# Altium PCB RADARPCB.PcbDoc
Units mil, origin at the board's own origin, x right, y up, seen from the top; angles counter-clockwise.
Board outline 3695 x 1210 mil, 2 copper layers (Top Layer, Bottom Layer); 42 components, 32 nets, 169 pads, 46 vias.
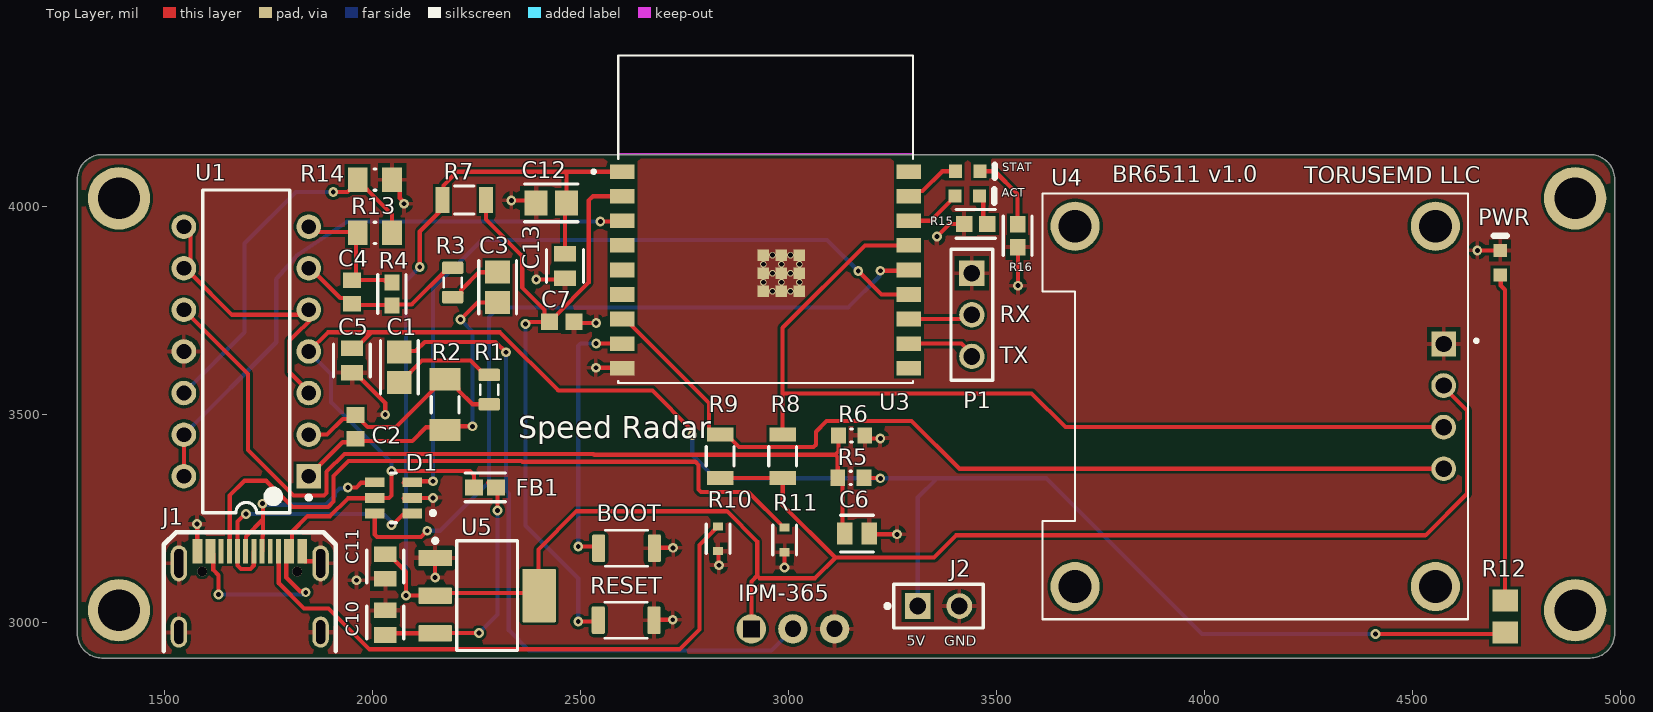
[diagram p0: Top Layer view]
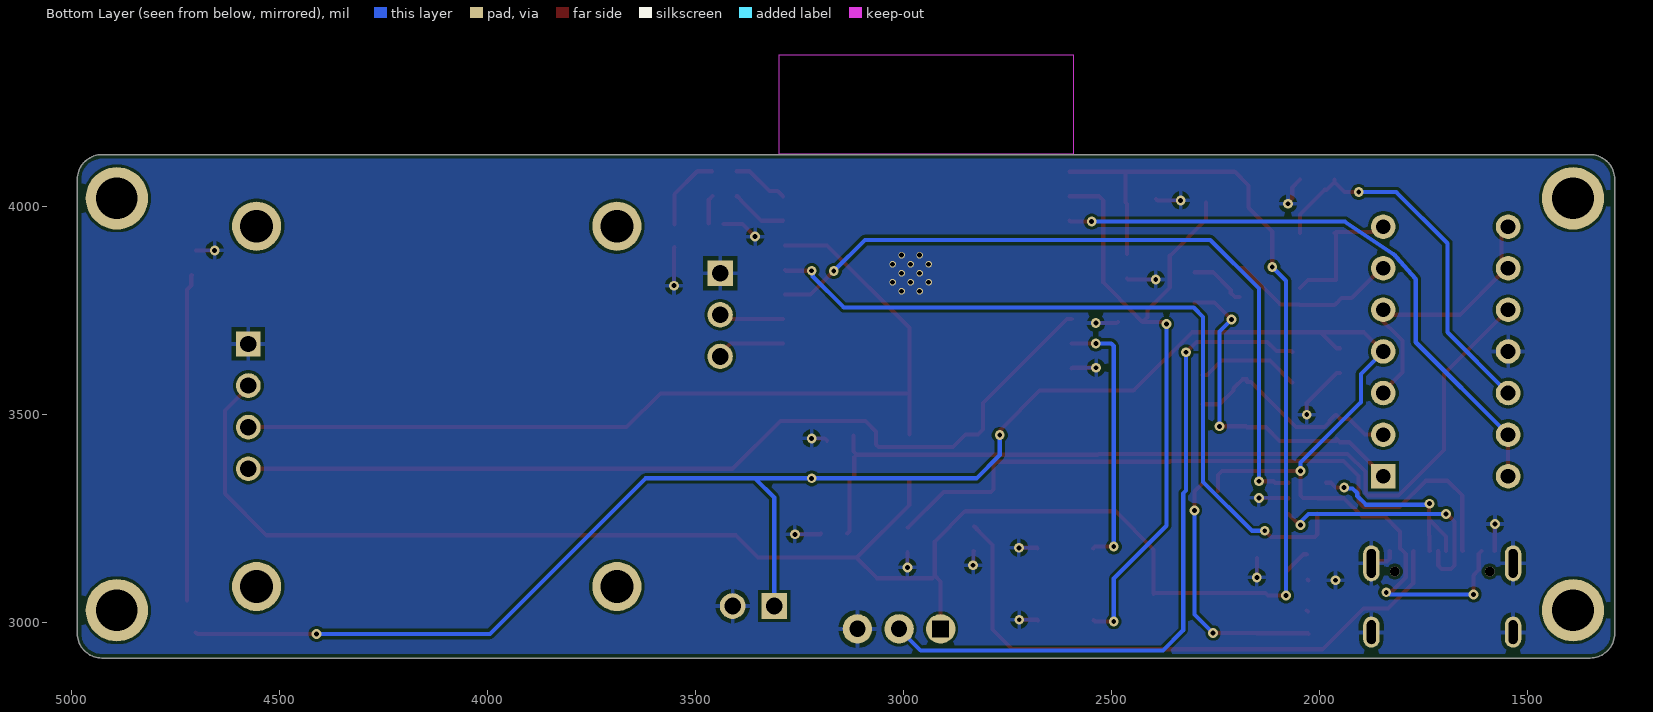
[diagram p1: Bottom Layer view, seen from below]
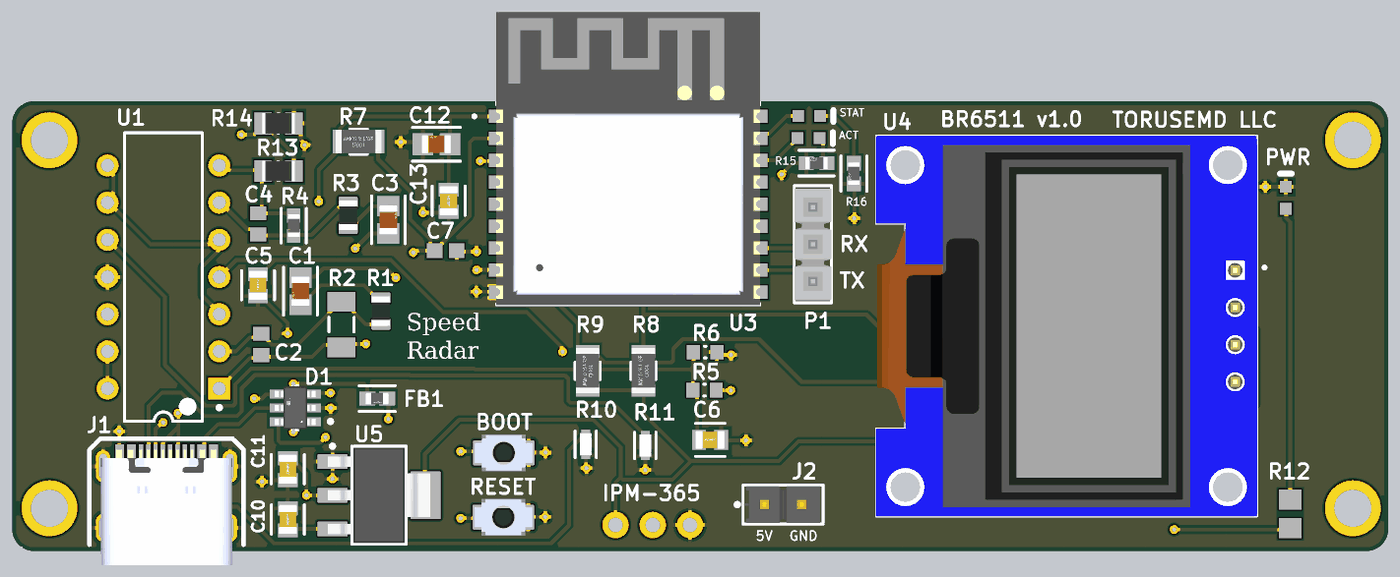
[diagram p2: 3D render of the assembled board from above, using the file's embedded part models]

## Layer stack, top to bottom
Top Solder: solder mask 0.4, Solder Resist, Dk 3.5
Top Layer: signal copper 1.4
Dielectric 1: dielectric 12.6, FR-4, Dk 4.8
Bottom Layer: signal copper 1.4
Bottom Solder: solder mask 0.4, Solder Resist, Dk 3.5

## Board outline
1290,2974.06 1290,4065.94 cw(c1349.06,4065.94) 1349.06,4125 4925.94,4125 cw(c4925.94,4065.94) 4985,4065.94 4985,2974.06 cw(c4925.94,2974.06) 4925.94,2915 1349.06,2915 cw(c1349.06,2974.06)

## Design rules (kind name [scope] priority, off if disabled: settings)
BoardOutlineClearance [All] p1: gap=10 ignorepadtopadclearanceinfootprint=FALSE except(0: Arc-SplitContinuation Track-SplitContinuation SMDPad-SplitContinuation THPad-SplitContinuation Via-SplitContinuation Fill-SplitContinuation Poly-SplitContinuation Region-SplitContinuation Text-SplitContinuation)
Clearance [All] p1: gap=7 ignorepadtopadclearanceinfootprint=FALSE except(5: SMDPad-SMDPad)
DiffPairsRouting [All] p1: maxlimit=10 minlimit=10 mostfreqgap=10 toplayer_minwidth=15 toplayer_maxwidth=15 toplayer_prefwidth=15 bottomlayer_minwidth=15 bottomlayer_maxwidth=15 bottomlayer_prefwidth=15 maxuncoupledlength=500
MinimumAnnularRing MinimumAnnularRing_1 [All] p1: minimumring=1
MinimumSolderMaskSliver MinimumSolderMaskSliver_1 [HasFootprint('RESC1005X40X25ML05T05') vs HasFootprint('RESC1005X40X25ML05T05')] p1: minsoldermaskwidth=5
PolygonConnect ESP32GND [InNet('GND') vs HasFootprint('MODULE_ESP32-C3-WROOM-02-H4')] p1: connectstyle=Direct reliefconductorwidth=10 reliefentries=4 polygonreliefangle="90 Angle" airgapwidth=10
PolygonConnect [All] p2: connectstyle=Relief reliefconductorwidth=10 reliefentries=4 polygonreliefangle="90 Angle" airgapwidth=10
RoutingVias [All] p1: holewidth=28 width=50 viastyle="Through Hole" minholewidth=28 minwidth=50 maxholewidth=28 maxwidth=50
SilkToSilkClearance [All] p1: silktosilkclearance=5.91
SilkToSolderMaskClearance [IsPad] p1: minsilkscreentomaskgap=3.94 clearancetoexposedcopper=TRUE
SolderMaskExpansion [All] p1: expansion=4 istentingtop=FALSE soldermaskfromhole=TRUE
SupplyNets "Schematic Supply Nets" [InNet('GND')] p1: voltage=0.000
SupplyNets "Schematic Supply Nets_4" [InNet('3V3')] p2: voltage=0.000
SupplyNets "Schematic Supply Nets_1" [InNet('5V')] p3: voltage=0.000
Width [All] p1: maxlimit=10 minlimit=10 preferedwidth=10
26 further rules are at their usual default settings.

## Classes and differential pairs
component class U_Power_Supply: C10 C11 D1 FB1 J1 J2 PWR R10 R11 R12 U5
component class U_Radar_Analog: C1 C2 C3 C4 C5 C6 IPM-365 R1 R2 R3 R4 R5 R6 R13 R14 U1
component class U_Radar_Digital: ACT BOOT C7 C12 C13 P1 r R7 R8 R9 R15 R16 RESET STAT U3 U4
differential pair D: +D_P -D_N

## Components (designator, comment, footprint, x,y, rotation, side; value= is the part's Value field where it differs from the comment)
ACT "HSMS-C190" AVAG-HSMX-C190_V 3428.6,4025.71 r0 top
BOOT "B3U-1000P-B" OMRON-B3U-1000P-2-B_V 2609.99,3178.91 r180 top
C1 "GCD21BR71H104KA01L" FP-GCD21B-0_15-IPC_A 2064,3614 r270 top value=0.1uF
C2 "2.7nF (VJ0603Y183KXAAC)" CAPC1608X92X38ML15T08 1958.66,3470.63 r270 top
C3 "GCD21BR71H104KA01L" FP-GCD21B-0_15-IPC_A 2300,3806 r90 top value=0.1uF
C4 "18nF" CAPC1608X92X38ML15T08 1950,3795 r90 top
C5 "10uF" FP-C0805C106K8RACAUTO-MFG 1950,3630 r270 top
C6 "10uF" FP-C0805C106K8RACAUTO-MFG 3164,3214 r0 top
C7 "1uF" CAPC1608X90X35NL15T15 2454,3723 r180 top
C10 "10uF" FP-C0805C106K8RACAUTO-MFG 2030,3000 r90 top
C11 "10uF" FP-C0805C106K8RACAUTO-MFG 2030,3135 r270 top
C12 "GCD21BR71H104KA01L" FP-GCD21B-0_15-IPC_A 2429,4009 r180 top value=0.1uF
C13 "10uF" FP-C0805C106K8RACAUTO-MFG 2462,3857 r270 top
D1 "USBLC6-4SC6" FP-SOT23-6L-MFG 2050,3300 r180 top value=3pF
FB1 "600 Ohm @ 100 MHz" FP-BLM18-0_15-t0_8-IPC_B 2270,3325 r0 top
IPM-365 "Component_1" PCBComponent_1 2910,2985 r0 top
J1 "TYPE-C-31-M-12" TYPE-C-31-M-12 1704.37,3060 r0 top
J2 "TSW-102-07-L-S" FP-TSW-102-07-L-S-MFG 3360,3040 r0 top
P1 "TSW-103-07-T-S" SMTC-TSW-103-07-X-S 3440,3840 r270 top
PWR "HSMG-C190" AVAG-HSMX-C190_V 4710,3865 r90 top
R1 "Resistor 1K +/-5% 0805 125 mW" RESC0805(2012)_L 2280,3560 r270 top value=1k
R2 "8.2k 1% 1206(3216)" RESC1206(3216)_M 2174,3524 r270 top value="8200.00 Ohm"
R3 "Resistor 1K +/-5% 0805 125 mW" RESC0805(2012)_L 2192,3817.89 r90 top value=1k
R4 "1.3k" FP-TFCR0603-IPC_B 2046,3790 r90 top
R5 "100K 5% 0603(1608)" RESC0603(1608)_N 3149,3348 r0 top value="100000.00 Ohm"
R6 "100K 5% 0603(1608)" RESC0603(1608)_N 3151,3450 r180 top value="100000.00 Ohm"
R7 "10kΩ" FP-RQ732B-IPC_C 2220,4016 r180 top value=10KΩ
R8 "10kΩ" FP-RQ732B-IPC_C 2985,3400 r270 top value=10KΩ
R9 "10kΩ" FP-RQ732B-IPC_C 2835,3400 r270 top value=10KΩ
R10 "5.1k" KOA_Speer_RN73R1J_MFG 2830,3202 r270 top
R11 "5.1k" KOA_Speer_RN73R1J_MFG 2990,3199 r270 top
R12 "200" RESC2013X70X40ML20T20 4721.76,3015 r90 top
R13 "Resistor 10k +/-1% 0805 125 mW" RESC2013X50X35ML15T15 2005,3937 r180 top value=10k
R14 "Resistor 10k +/-1% 0805 125 mW" RESC2013X50X35ML15T15 2005,4065 r180 top value=10k
R15 "330R (RMCF0603JG330R)" FP-RMCF0603-IPC_B 3449.66,3958.37 r180 top
R16 "330R (RMCF0603JG330R)" FP-RMCF0603-IPC_B 3550,3930 r270 top
RESET "B3U-1000P-B" OMRON-B3U-1000P-2-B_V 2608.93,3006 r0 top
STAT "HSMY-C190" AVAG-HSMX-C190_V 3430,4085 r0 top
U1 "LM324AN" TI-N0014A 1696,3652 r180 top
U3 "ESP32-C3-WROOM-02-H4" MODULE_ESP32-C3-WROOM-02-H4 2944.32,3969.92 r0 top
U4 "DM-OLED096-636" MODULE_DM-OLED096-636 4121.2,3520 r270 top
U5 "LMS8117AMP-3.3/NOPB" DCY0004A_M 2275,3065 r0 top

## Footprints (in the part's own frame and the unit in brackets; to place one, negate y for a bottom-side part, rotate by r counter-clockwise, add the part's x,y. Pads: shape width x height; smd on the part's side, far side on the other; paste and mask are expansions set on the pad)
AVAG-HSMX-C190_V [mm] "SMD, 2-Leads, Body 1.6x0.8mm, Height 0.9mm"
  rect 0.8x0.8 smd: 1(-0.75,0) 2(0.75,0)
  silkscreen extent 1.65,-0.4 1.65,0.4, body extent -0.8,-0.4 0.8,0.4, height 0.9
CAPC1608X90X35NL15T15 [mm] "Chip Capacitor, 2-Leads, Body 1.60x0.81mm, IPC Medium Density"
  rect 1.05x1 smd: 1(-0.75,0) 2(0.75,0)
  body extent -0.88,-0.48 0.87,0.48, height 0.9
CAPC1608X92X38ML15T08 [mm] "Chip Capacitor, 2-Leads, Body 1.60x0.80mm, IPC Low Density"
  rect 0.95x1.1 smd: 1(-0.725,0) 2(0.725,0)
  body extent -0.87,-0.48 0.87,0.47, height 0.92
DCY0004A_M [mm] "SOT223, 4-Leads, Body 6.7x3.7mm, Pitch 2.3mm, IPC Low Density"
  rrect10% 2.05x1 smd: 1(-3.175,2.3) 2(-3.175,0) 3(-3.175,-2.3)
  rrect5% 2.05x3.25 smd: 4(3.175,0)
  silkscreen extent -3.3,-3.35 1.85,3.47, body extent -3.5,-3.25 3.5,3.25, height 1.62
FP-BLM18-0_15-t0_8-IPC_B [mil]
  rect 43.55x37.73 smd paste+0 mask+0: 1(-26.62,0) 2(26.62,0)
  silkscreen extent -48,-35 48,35, body extent -58,-29 58,29, height 10
FP-C0805C106K8RACAUTO-MFG [mm]
  rect 0.95x1.35 smd paste+0 mask+0: 1(-0.75,0) 2(0.75,0)
  silkscreen extent -1,-1.12 1,1.12, body extent -1.4,-0.85 1.4,0.85, height 0.25
FP-GCD21B-0_15-IPC_A [mil]
  rect 55.34x59.38 smd paste+0 mask+0: 1(-36.47,0) 2(36.47,0)
  silkscreen extent -64,-45 64,45, body extent -84,-49 84,49, height 10
FP-RMCF0603-IPC_B [mil]
  rect 39.61x37.73 smd paste+0 mask+0: 1(-27.6,0) 2(27.6,0)
  silkscreen extent -47,-35 47,35, body extent -57,-29 57,29, height 10
FP-RQ732B-IPC_C [mil]
  rect 33.79x63.47 smd paste+0 mask+0: 1(-52.24,0) 2(52.24,0)
  silkscreen extent -24,-33 24,33, body extent -73,-37 73,37, height 10
FP-SOT23-6L-MFG [mm]
  rect 1.2x0.6 smd paste+0 mask+0: 1(-1.15,0.95) 2(-1.15,0) 3(-1.15,-0.95) 4(1.15,-0.95) 5(1.15,0) 6(1.15,0.95)
  silkscreen extent -2.53,-1.53 0.18,1.53, body extent -1.85,-1.63 1.85,1.63, height 0.25
FP-TFCR0603-IPC_B [mil]
  rect 37.72x35.91 smd paste+0 mask+0: 1(-27.64,0) 2(27.64,0)
  silkscreen extent -46,-34 46,34, body extent -56,-28 56,28, height 10
FP-TSW-102-07-L-S-MFG [mm]
  rect 1.57x1.57 hole 1.02 paste-2539.97 mask+0: 1(-1.27,0)
  round 1.57 hole 1.02 paste-2539.97 mask+0: 2(1.27,0)
  silkscreen extent -3.25,-1.34 2.73,1.34, body extent -2.83,-1.44 2.83,1.44, height 0.25
KOA_Speer_RN73R1J_MFG [mm]
  rect 0.5x0.6 smd paste+0 mask+0: 1(-0.75,0) 2(0.75,0)
  silkscreen extent -0.9,-0.72 0.9,0.72, body extent -1.1,-0.55 1.1,0.55, height 0.25
MODULE_DM-OLED096-636 [mm]
  rect 1.508x1.508 / inner round 1.508 / far side rect 1.508x1.508 hole 1: 1(-3.81,11.5)
  round 1.508 hole 1: 2(-1.27,11.5) 3(1.27,11.5) 4(3.81,11.5)
  round 3 hole 2: S1(-11,11) S2(11,11) S3(11,-11) S4(-11,-11)
  silkscreen extent -13,-13 13,13.6, body extent -13,-13 13,13, height 5.66
MODULE_ESP32-C3-WROOM-02-H4 [mm]
  rect 1.5x0.9 smd: 1(-8.75,2.9) 2(-8.75,1.4) 3(-8.75,-0.1) 4(-8.75,-1.6) 5(-8.75,-3.1) 6(-8.75,-4.6) 7(-8.75,-6.1) 8(-8.75,-7.6) 9(-8.75,-9.1) 10(8.75,-9.1) 11(8.75,-7.6) 12(8.75,-6.1) 13(8.75,-4.6) 14(8.75,-3.1) 15(8.75,-1.6) 16(8.75,-0.1) 17(8.75,1.4) 18(8.75,2.9)
  rect 0.7x0.7 smd: 19(-0.14,-2.2) 20(0.96,-2.2) 21(2.06,-2.2) 22(-0.14,-3.3) 23(0.96,-3.3) 24(2.06,-3.3) 25(-0.14,-4.4) 26(0.96,-4.4) 27(2.06,-4.4)
  round 0.4 hole 0.3 mask+0: 28(0.41,-2.2) 29(1.51,-2.2) 30(-0.14,-2.75) 31(0.96,-2.75) 32(2.06,-2.75) 33(0.41,-3.3) 34(1.51,-3.3) 35(-0.14,-3.85) 36(0.96,-3.85) 37(2.06,-3.85) 38(0.41,-4.4) 39(1.51,-4.4)
  Keep-Out Layer region: 9,4 -9,4 -9,10 9,10
  Keep-Out Layer region: 9,4 -9,4 -9,10 9,10
  silkscreen extent -10.6,-10 9,10, body extent -9,-10 9,10, height 3.35
OMRON-B3U-1000P-2-B_V [mm] "SMT, 2-Leads, Body 3x2.5mm"
  rrect25% 0.8x1.7 smd: 1(-1.7,0) 2(1.7,0)
  round 0 on Mech1: H1(0,0)
  silkscreen extent -1.3,-1.1 1.3,1.1, body extent -2,-1.25 2,1.25, height 1.6
PCBComponent_1 [mm]
  round 1.8 hole 1 square: 1(0,0)
  round 1.8 hole 1: 2(2.54,0) 3(5.08,0)
RESC0603(1608)_N [mm] "Chip Resistor, Body 1.6x0.8mm, IPC Medium Density"
  rect 0.9x1 smd: 1(-0.8,0) 2(0.8,0)
  silkscreen extent -0.05,-0.4 0.05,0.4, body extent -0.85,-0.47 0.85,0.47, height 0.6
RESC0805(2012)_L [mm] "Chip Resistor, Body 2.0x1.3mm, IPC High Density"
  rrect25% 0.76x1.3 smd: 1(-0.9,0) 2(0.89,0)
  silkscreen extent -0.3,-0.55 0.3,0.55, body extent -1,-0.62 1,0.63, height 0.6
RESC1206(3216)_M [mm] "Chip Resistor, Body 3.2x1.6mm, IPC Low Density"
  rect 1.35x1.9 smd: 1(-1.55,0) 2(1.55,0)
  silkscreen extent -0.5,-0.85 0.5,0.85, body extent -1.67,-0.87 1.67,0.87, height 0.75
RESC2013X50X35ML15T15 [mm] "Chip Resistor, 2-Leads, Body 2.2x1.4mm, IPC Low Density"
  rect 1.2x1.5 smd: 1(-1.05,0) 2(1.05,0)
  silkscreen extent -0.05,-0.65 0.05,0.65, body extent -1.1,-0.7 1.1,0.7, height 0.5
RESC2013X70X40ML20T20 [mm] "Chip Resistor, 2-Leads, Body 2.00x1.25mm, IPC Low Density"
  rect 1.35x1.55 smd: 1(-0.975,0) 2(0.975,0)
  body extent -1.1,-0.72 1.1,0.72, height 0.7
SMTC-TSW-103-07-X-S [mm] ".025 SQ Post Terminal Strip Assembly, 1x3 Pins, Vertical, 2.54mm Pitch, Male"
  rect 1.55x1.55 hole 1.02: 1(0,0)
  round 1.55 hole 1.02: 2(2.54,0) 3(5.08,0)
  silkscreen extent -1.46,-1.27 6.54,1.27, body extent -1.27,-1.27 6.35,1.27, height 8.38
TI-N0014A [mm] "DIP, 14-Leads, Body 19.7x6.6mm, Pitch 2.54mm"
  rect 1.5x1.5 hole 0.9: 1(-3.81,7.62)
  round 1.5 hole 0.9: 2(-3.81,5.08) 3(-3.81,2.54) 4(-3.81,0) 5(-3.81,-2.54) 6(-3.81,-5.08) 7(-3.81,-7.62) 8(3.81,-7.62) 9(3.81,-5.08) 10(3.81,-2.54) 11(3.81,0) 12(3.81,2.54) 13(3.81,5.08) 14(3.81,7.62)
  silkscreen extent -3.94,-9.85 2.65,9.85, body extent -3.95,-9.85 3.95,9.85, height 5.08
TYPE-C-31-M-12 [mm]
  rect 0.6x1.5 smd mask+0.07: A1B12(-3.2,2.85) B1A12(3.2,2.85)
  rect 0.6x1.5 smd mask+0.14: A4B9(-2.4,2.85) B4A9(2.4,2.85)
  rect 0.3x1.5 smd mask+0.14: A5(-1.25,2.85) A6(-0.25,2.85) A7(0.25,2.85) A8(1.25,2.85) B5(1.75,2.85) B6(0.75,2.85) B7(-0.75,2.85) B8(-1.75,2.85)
  round 0.6 hole 0.6 unplated mask+0.3: MH(-2.9,1.6) MH(2.9,1.6)
  oval 1x1.9 hole 0.55 slot 1.45 at 90 deg mask+0.05: SH(-4.325,-2.1) SH(4.325,-2.1)
  oval 1x2.2 hole 0.55 slot 1.75 at 90 deg mask+0.05: SH(-4.325,2.1) SH(4.325,2.1)
  silkscreen extent -5.25,-3.25 5.25,4, body extent -4.47,-4.65 4.47,3.25, height 3.32

## Part data
ACT: library part CMP-2000-06427-1, "LED Uni-Color Red, 52 mW, 20 mA, -40 to 85 degC, 2-Pin SMD, RoHS, Tape and Reel", Emitting Color=Red, Forward Current=25mA, Forward Voltage=2.6V, Manufacturer=Avago, Operating Temp Range=-40Cto85C, Operating Temperature Classification=Industrial, Package Description="2-Pin Surface Mount Device, Body 1.6 x 0.8 mm, Height 0.9 mm", Package Reference=HSMX-C190, Package Type=ChipLed, Power Dissipation=52W, Reverse Voltage=5V, Test Current (It)=20mA, Chip Material=GaP, Datasheet URL=http://docs.avagotech.com/docs/AV02-0551EN, Datasheet Version=03/2012, DELETED=Compliant, Dominant Wave Length=626nm, High Brightness=No, Lens Dimensions=1x0.8x0.5mm, Lens Type=ColorlessDiffused, Lum Intensity=10mcd, Luminous Intensity=10mcd, Main Category=ChipLED, Manufacturer URL=http://www.avagotech.com/, Mounting=SurfaceMount, Mounting Technology=SurfaceMount, Number of  Elements=1, Packaging=TapeandReel, Peak Wavelength=630nm, Pin Count=2, Product Depth (mm)=0.8mm, Product Height (mm)=0.8mm, Product Length (mm)=1.6mm, Rad Hardened=No, Shape Type=Rectangular, Type=Uni-Color, Viewing Angle=170deg
BOOT RESET: library part CMP-011-00011-3, "Ultra-small Surface-mounting Tactile Switches with High Contact Reliability, SPST-NO, -25 to 70 degC, 2-Pin SMD, RoHS, Tape and Reel", Current Rating=50mA, Voltage Rating=12V, Pins=2, RoHS Compliant=Details
C1 C3 C12: library part CMP-001-00087-1, "Ceramic Capacitor, Multilayer, Ceramic, 50V, 10% +Tol, 10% -Tol, X7R, 15% TC, 0.1uF, Surface Mount, 0805", Capacitor Type=Ceramic, Case/Package=0805, Max Operating Temperature=125°C, Min Operating Temperature=-55°C, Mounting Technology="Surface Mount", Pins=2, RoHS Compliant=Yes
  C3: ComponentLink1Description="New link", ComponentLink2Description="New link 1"
C2: library part CMP-2006-01326-1, Manufacturer=Vitramon, Part Number=VJ0603Y183KXAAC
C4: library part CMP-1035-02398-2, Manufacturer=Vitramon, Part Number=VJ0603Y183JXXAC
C5 C6 C10 C11 C13: library part CMP-03020-034662-1, "CAP CER 10UF 10V X7R 0805", Case Code (Imperial)=0805, Case Code (Metric)=2012, Max Operating Temperature=125°C, Min Operating Temperature=-55°C, Ratings=AEC-Q200, Tolerance=10%, Voltage Rating=10V, Capacitance=10uF, Case/Package=0805, Mount="Surface Mount", Packaging="Tape and Reel", RoHS Compliant=Yes
C7: library part CMP-2006-04534-1, Manufacturer="AVX Interconnect / Elco", Part Number=0603YD105MAT2A
D1: library part CMP-2000-07370-2, "TVS DIODE 5.25V 17V SOT23-6", Breakdown Voltage=6V, Capacitance=3pF, Clamping Voltage=17V, Manufacturer=STMicroelectronics, Max Junction Temp=+125°C, Package=SOT23-6L, Peak Pulse Power=130W, Temperature="-40°C to +125°C", Temperature Range Low=-40°C, Automotive=No, Category=Diode, ComponentLink2Description=Datasheet, ComponentLink2URL=https://upverter.com/datasheet/23dc4ffb028d868909e80577610284b194f13213.pdf, Device Class L1="Circuit Protection", Device Class L2="ESD and Circuit Protection ICs", Device Class L3=unset, Digikey Description="TVS DIODE 5.25V 17V SOT23-6", Direction=Unidirectional, Height=1.45mm, Interface=USB,Ethernet,Other, Lead Free=Yes, Manufacturer Part Number=USBLC6-4SC6, Mouser Description="USBLC6 Series 4 Line 6 V Uni / Bi-Directional ESD Protection - SOT-23-6", Number Of Channels=4, Octopart=https://octopart.com/usblc6-4sc6-stmicroelectronics-347147, RoHS=TRUE, Standoff Height=0mm, Temperature Range High=+125°C
FB1: library part CMP-06046-001498-1, "Chip Ferrite Bead, 0603, 600Ω @ 100MHz, 0.25Ω, 25%, 800mA"
J1: library part CMP-002-00145-2, "USB Type C Connector Horizontal SMT", Manufacturer="Koren Hroparts", Design Item ID=TYPE-C-31-M-12, Manufacturer Part Number=TYPE-C-31-M-12, Source=Schematic-Lib-PhilsLab.SchLib, System=Connector
J2: library part CMP-02766-001428-1, "CONN HEADER VERT 2POS 2.54MM", Color=Black, Current Rating=7.6A, Max Operating Temperature=125°C, Max Voltage Rating (AC)=550V, Min Operating Temperature=-55°C, Package Quantity=1, Connector Type="Male Pin", Contact Material=Bronze, Contact Mating Length=0.23inch, Contact Plating=Gold, Contact Type="Male Pin", Depth=2.54mm, Gender=Male, Housing Color=Black, Housing Material=Polyester, Lead Free="Lead Free", Length=5.08mm, Max Current Rating=7.6A, Mount="Through Hole", Number of Contacts=2, Number of Positions=2, Number of Rows=1, Orientation=Straight, Packaging=Bulk, Pitch=2.54mm, Radiation Hardening=No, REACH SVHC="No SVHC", RoHS Compliant=Yes, Series=TSW, Termination=Solder, Voltage Rating=550V, Width=2.54mm
P1: library part CMP-1024-00332-1, "0.025\" SQ Post Header, Through-hole, Vertical, -55 to 105 degC, 2.54 mm Pitch, 3-Pin, Male, RoHS", Manufacturer=Samtec, Temperature Range="-55 to 105 degC", ComponentLink1Description="Manufacturer URL", ComponentLink1URL=http://www.samtec.com, ComponentLink2Description=Datasheet, ComponentLink2URL=http://www.samtec.com/documents/webfiles/pdf/TSW_TH.PDF, ComponentLink3Description="Package Specification", ComponentLink3URL=http://www.samtec.com/documents/webfiles/cpdf/TSW-XXX-XX-XXX-X-XX-XXX-MKT.pdf, DatasheetVersion=F-214, Mounting Technology=Through-hole, Orientation=Vertical, PackageDescription=".025[0.64] SQ. Post Terminal Strip Assembly", PackageReference=TSW-103-07-X-S, PackageVersion="DM, 8/1988", PartNumber=TSW-103-07-T-S, Pitch="2.54 mm", RoHS=True
PWR: library part CMP-007-00013-2, "LED Uni-Color Green, 52 mW, 20 mA, -40 to 85 degC, 2-Pin SMD, RoHS, Tape and Reel", Case/Package=0603, Colour=Green, Forward Current=20mA, Forward Voltage=2.2V, Manufacturer=Avago, Max Operating Temperature=85°C, Min Operating Temperature=-40°C, Package Description="2-Pin Surface Mount Device, Body 1.6 x 0.8 mm, Height 0.9 mm", Package Quantity=4000, Package Reference=HSMX-C190, Power=52mW, Datasheet URL=http://docs.avagotech.com/docs/AV02-0551EN, Datasheet Version=Mar-12, Illumination Colour=Green, Lens Style=Diffused, Luminous Intensity=15mcd, Manufacturer URL=http://www.avagotech.com/, Mounting Technology=SM, Nominal Vf=2.2V, Packaging=TapeandReel, Pins=2, RoHS Compliant=True, Viewing Angle=170degrees
R1 R3: library part CMP-009-00118-4, "Chip Resistor, 1 kOhms, +/-5%, 125 mW, -55 to 155 degC, 0805", Case/Package=0805, Max Operating Temperature=155°C, Min Operating Temperature=-55°C, Power=125mW, Tolerance=5%, Pins=2
R2: library part CMP-1014-00613-1, "8K2 0.25W 1% 1206 (3216 Metric)  SMD", Case-EIA=1206, Case-Metric=3216, Power="0.25 W", Tolerance="1 %", Technology=SMT
R4: library part CMP-250906-279364-1, "RES Thin Film,  1.3kΩ, 0.1%, 0.1W, 25ppm/°C, 0603"
R5 R6: library part CMP-1012-00122-1, "100K 0.1W 5% 0603 (1608 Metric)  SMD", Case-EIA=0603, Case-Metric=1608, Power="0.1 W", Tolerance="5 %", Technology=SMT
R7 R8 R9: library part CMP-03211-005393-1, "RQ732B 1206 10KΩ 0.4W 10ppm/°C 0.1% 200V", Manufacturer=TE, Manufacturer Part Number=RQ73C2B10KBTD, Package=RQ732B, Power Rating=0.4W, Resistance=10KΩ, Temperature="-55°C to +155°C", Temperature Coefficient=10ppm/°C, Temperature Range High=+155°C, Temperature Range Low=-55°C, Tolerance=0.1%, Voltage Rating=200V, Automotive=Yes, Automotive Grade="Grade 0", Category=Res, ComponentLink2Description=Datasheet, ComponentLink2URL=https://www.te.com/commerce/DocumentDelivery/DDEController?Action=showdoc&DocId=Data+Sheet%7F1773270-2%7FA%7Fpdf%7FEnglish%7FENG_DS_1773270-2_A.pdf%7F9-2176388-464, Composition="Thin Film", Device Class L1="Passive Components", Device Class L2=Resistors, Device Class L3="Chip SMD Resistors", Height=0.75mm, Ipc Land Pattern Name=RESC310160X60, Lead Free=Yes, Octopart=https://octopart.com/rq73c2b10kbtd-te+connectivity-93910771, RoHS=TRUE, Series=RQ73
R10 R11: library part CMP-00683-99548008-1, "RN73R1JTTD5101B25 Res, 5K1, 0.1%, 0.1W, 0603 Rohs Compliant: Yes", Ambient Temperature Range High=85°C, Case/Package=0603, Max Operating Temperature=155°C, Min Operating Temperature=-55°C, Power Rating=100mW, Resistance=5.1kΩ, Temperature Coefficient=25ppm/°C, Tolerance=0.1%, Voltage Rating=75V, Composition="Thin Film", Height=550µm, NexarPartId=99548008
R12: library part CMP-2001-00025-1, Manufacturer=Panasonic, Part Number=ERJ-6ENF2000V
R13 R14: library part CMP-009-00018-6, "Chip Resistor, 10 KOhm, +/- 1%, 125 mW, -55 to 155 degC, 0805 (2012 Metric)", Case/Package=0805, Max Operating Temperature=155°C, Min Operating Temperature=-55°C, Power=125mW, Tolerance=1%, Voltage Rating=150V, Mounting Technology=SM, Pins=2, RoHS Compliant=True
R15 R16: library part CMP-26527-007473-1, "330Ω ±5% 0.1W 0603 Thick Film Chip Resistor AEC-Q200 compliant", Case/Package=0603, Max Operating Temperature=155°C, Max Power Dissipation=100mW, Min Operating Temperature=-55°C, Resistance=330R, Resistor Type="Thick Film", Temperature Coefficient=200ppm/°C, Tolerance=5%, Contact Plating=Tin, Features="Automotive AEC-Q200", Height=0.022inch, Length=0.061inch, Mount="Surface Mount", Number of Terminations=2, Packaging="Tape and Reel", Radiation Hardening=No, RoHS Compliant=Yes, Series=RMCF, Width=0.031inch
STAT: library part CMP-1744-00003-1, "LED Uni-Color Yellow, 65 mW, 20 mA, -40 to 85 degC, 2-Pin SMD, RoHS, Tape and Reel", Case Code (Imperial)=0603, Case Code (Metric)=1608, Max Operating Temperature="155 degC", Min Operating Temperature="-55 degC", Package Quantity=5000, Power Rating="100 mW", Resistance="390 Ohm", Tolerance=1%, Voltage Rating="50 V", Case\Package=0603, ComponentLink1Description="Manufacturer URL", ComponentLink1URL=http://www.avagotech.com/, ComponentLink2Description=Datasheet, ComponentLink2URL=http://docs.avagotech.com/docs/AV02-0551EN, ComponentLink3Description="Package Specification", ComponentLink3URL=http://www.fairchildsemi.com/dwg/MA/MA03D.pdf, DatasheetVersion=Mar-12, Height="0.45 mm", Length="1.6 mm", Mount="Surface Mount", PackageDescription="2-Pin Surface Mount Device, Body 1.6 x 0.8 mm, Height 0.9 mm", PackageReference=HSMX-C190, Packaging="Tape and Reel", Pins=2, REACH SVHC="No SVHC", RoHSCompliant=true, Voltage Rating (DC)="50 V", Width="0.8 mm"
U1: library part CMP-014-00016-2, "Quadruple Operational Amplifier, 1.2 MHz, 0 to 70 degC, 14-Pin PDIP (N), Pb-Free (RoHS), Tube", Case/Package=DIP, Manufacturer="Texas Instruments (TI)", Max Dual Supply Voltage=16V, Max Operating Temperature=70°C, Min Dual Supply Voltage=1.5V, Min Operating Temperature=0°C, Nominal Dual Supply Voltage=12V, Nominal Supply Current=3mA, Nominal Voltage Gain=100dB, Output Current=30mA, Package Description="14-Pin Double In-line Package, Body 19.305 x 6.35 mm, Pitch 2.54 mm", Package Quantity=25, Package Reference=N-14, Datasheet URL=http://www.ti.com/lit/ds/symlink/lm324a.pdf, Datasheet Version="SLOS066W, 03/2015", Manufacturer URL=http://www.ti.com/, Max Supply Voltage=16V, Min Supply Voltage=1.5V, Mounting Technology=TH, Nominal Supply Voltage=12V, Package URL=http://www.ti.com/lit/ml/mpdi002c/mpdi002c.pdf, Pins=14, RoHS Compliant=True, Unity Gain Bandwidth Product=1.2MHz
U3: "WiFi Modules (802.11) (Engineering Samples) SMD module, ESP32-C3, 4MB SPI flash, PCB antenna, -40 C +105 C", Package=Package, Check_prices=https://www.snapeda.com/parts/ESP32-C3-WROOM-02-H4/Espressif+Systems/view-part/?ref=eda, MF="Espressif Systems", MP=ESP32-C3-WROOM-02-H4, SnapEDA_Link=https://www.snapeda.com/parts/ESP32-C3-WROOM-02-H4/Espressif+Systems/view-part/?ref=snap
U4: "0.96â€ 128 X 64 MONOCHROME GRAPHIC OLED DISPLAY MODULE - I2C", Package=Package, Check_prices=https://www.snapeda.com/parts/DM-OLED096-636/Display+Module/view-part/?ref=eda, MF="Display Module", MP=DM-OLED096-636, SnapEDA_Link=https://www.snapeda.com/parts/DM-OLED096-636/Display+Module/view-part/?ref=snap
U5: library part CMP-019-00008-3, "Low-Dropout Linear Regulator, 1 A, 3.3 V, 0 to 125 degC, 4-Pin SOT223 (DCY), RoHS, Tape and Reel", Case/Package=SOT-223, Dropout Voltage=1.2V, Manufacturer="Texas Instruments", Max Input Voltage=15V, Max Operating Temperature=125°C, Max Ouput Current=1A, Min Input Voltage=2.5V, Min Operating Temperature=0°C, Min Supply Voltage=3.2V, Nominal Supply Current=5mA, Output Voltage=3.3V, Package Description="4-Pin Small Outline Transistor, Body 6.5 x 3.5 mm, Pitch 2.3 mm", Package Quantity=1000, Package Reference=DCY0004A, Datasheet URL=http://www.ti.com/lit/ds/symlink/lms8117a.pdf, Datasheet Version="SNOS487F, 05/2004", Manufacturer URL=http://www.ti.com/, Max Supply Voltage=15V, Mounting Technology=SM, Output Current=1A, Outputs=1, Packaging=TapeandReel, Pins=4, RoHS Compliant=True

## Free pads (board coordinates)
  round 150 hole 100: 3(1390,4020) 3(4890,4020) 4(1390,3030) 4(4890,3030)

## Via types
v1: diameter 23.62, hole 11.81, Top Layer to Bottom Layer, 46 vias

## Nets (pads, with @x,y where several pads share a name; then routed paths per layer and width w, separated by ;. In a path a pad name is that pad's centre, name@x,y a point inside that pad or via, vN(x,y) a via of type N, cw(c..) or ccw(c..) an arc to the next point about the centre after c; other vN are vias at no path point)
3V3: C11.1 C12.1 C13.1 IPM-365.1 R7.2 R8.2 R9.2 U3.1 U4.2 U5.2 U5.4 | length 5499.8
  Top Layer w10: C11.1 2037.87,3164.53 2080,3122.4 v1(2080,3065) 2122.83,3065 2129.33,3071.5 U5.4@2398,3071.5 ; v1(2113,3855) 2113,3940.4 2169.88,3997.28 2169.88,4050.88 2203.09,4084.09 2465,4084.09 ; U5.4@2398,3069.5 U5.4@2398,3071.5 ; C13.1 2462,4006.53 2465.47,4010 2465.47,4083.63 2465,4084.09 ; U3.1 2465,4084.09 ; R9.2 R8.2 2985.28,3347.48 2985.28,3283.06 3112.17,3156.17 ; IPM-365.1 2910,3098.86 2924,3112.86 ; U4.2@4570,3570 4630,3510 4630,3310 4530,3210 3402,3210 3348.86,3156.86 3112.86,3156.86 3112.17,3156.17 ; U5.4@2398,3071.5 2398,3176 2490,3268 2851,3268 2924,3195 2924,3112.86 ; 2924,3112.86 2929.86,3107 3063,3107 3112.17,3156.17
  Bottom Layer w10: v1(2080,3065) 2080,3822 v1(2113,3855)
5V: C5.1 D1.5 FB1.1 J1.A4B9 J1.B4A9 J2.1 R5.2 R12.1 U1.4 | length 5099.9
  Top Layer w10: J1.A4B9 1616.69,3165.39 1616.69,3126.31 1629,3114 v1(1629,3068) ; v1(1839,3073) 1836.39,3075.61 1825.39,3075.61 1792,3109 1792,3141.82 1792.05,3141.87 1792.05,3165.39 J1.B4A9 1805.67,3179.02 1805.67,3218.67 1843,3256 1897.47,3256 1940.47,3299 D1.5@2004.72,3299 ; U1.4 1892,3698 2000,3698 ; C5.1 1957.87,3659.53 1996.35,3698 2000,3698 ; D1.5 2039.14,3300 2045,3305.86 v1(2045,3365) 2233.52,3365 2243.38,3355.14 FB1.1@2243.38,3316.47 ; v1(2768,3451) 2765.39,3453.61 2765.39,3464.61 2672,3558 2446,3558 2306,3698 2000,3698 ; R5.2@3168.69,3348 3169.19,3347.5 3219.5,3347.5 v1(3220,3347) ; v1(4410,2973) 4697,2973 R12.1@4700.61,2976.61
  Bottom Layer w10: v1(1629,3068) 1830.31,3068 1835.31,3073 v1(1839,3073) ; U1.4 1900,3598 1900,3530 2045,3385 v1(2045,3365) ; v1(2768,3451) 2768,3403 2824,3347 v1(3220,3347) 3356,3347 ; J2.1 3310,3301 3356,3347 ; v1(4410,2973) 3993.5,2973 3619.5,3347 3356,3347
BOOT_SW: BOOT.2 U3.8 | length 636.2
  Top Layer w10: v1(2494,3183) 2538.98,3183 BOOT.2 ; v1(2537,3671) 2594.48,3671 U3.8@2594.77,3670.71
  Bottom Layer w10: v1(2494,3183) 2494,3665.14 2499.86,3671 v1(2537,3671)
D_N: D1.1 J1.A7 J1.B7 | length 619.1
  Top Layer w10: v1(1695,3261) 1692.7,3261 1674.84,3243.14 J1.B7 1675.22,3171.83 1675.22,3137.12 1683.07,3129.27 1705.99,3129.27 1713.84,3137.12 1713.84,3171.83 J1.A7 ; v1(2045,3235) 2047.68,3235 D1.1@2074.28,3261.6
  Bottom Layer w10: v1(1695,3261) 2025.7,3261 2042.39,3244.31 2042.39,3237.61 v1(2045,3235)
D_P: D1.4 J1.A6 J1.B6 | length 484.5
  Top Layer w10: J1.A6@1694.9,3172.2 1694.9,3207.28 1736.35,3248.73 ; J1.B6@1734.27,3172.2 1734.8,3172.74 1734.8,3208.06 1736.35,3209.61 1736.35,3248.73 ; v1(1735,3286) 1736.35,3284.65 1736.35,3248.73 ; v1(1940,3325) 1960.51,3325 1971.91,3336.4 D1.4@1983.72,3336.4
  Bottom Layer w10: v1(1735,3286) 1737.34,3283.66 1888.02,3283.66 1908.7,3304.35 1908.7,3311.31 1919.79,3322.39 1937.39,3322.39 v1(1940,3325)
EN_SW: C7.2 R7.1 RESET.1 U3.2 | length 1643.2
  Top Layer w10: R7.1@2272.24,4010 2272.24,3968.76 2359.16,3881.84 2359.16,3805.84 2413.17,3751.83 2413.17,3734.3 C7.2 ; v1(2367,3718) 2370.69,3718 2375.69,3723 C7.2 ; v1(2494,3003) 2539,3003 RESET.1 ; U3.2 2529.04,4025.04 2519,4015 2519,3817.53 2440.14,3738.67 2440.14,3737.69 2425.46,3723 C7.2
  Bottom Layer w10: v1(2367,3718) 2367,3233 2494,3106 v1(2494,3003)
GND: BOOT.1 C5.2 C6.2 C7.1 C10.2 C11.2 C12.2 C13.2 D1.2 IPM-365.3 J1.A1B12 J1.B1A12 J1.SH J2.2 P1.1 PWR.2 R6.1 R10.2 R11.2 R14.1 R15.2 R16.2 RESET.2 U1.11 U3.9 U3.19 U3.20 U3.21 U3.22 U3.23 U3.24 U3.25 U3.26 U3.27 U3.28 U3.29 U3.30 U3.31 U3.32 U3.33 U3.34 U3.35 U3.36 U3.37 U3.38 U3.39 U4.1 U5.1 | length 1200
  Top Layer w10: v1(1577.57,3237.22) 1577.98,3236.82 1577.98,3172.61 J1.A1B12 ; J1.B1A12 1830.35,3154.49 1837.17,3147.68 1869.65,3147.68 J1.SH@1874.65,3142.68 ; C5.2 1957.87,3600.47 2030,3528.35 v1(2030,3500) ; C11.2@2026.53,3102 C11.2@2028,3103.47 ; C10.2@2027,3026.53 C10.2 ; R14.1 2064.96,4046.38 2064.96,4020.73 2075,4010.69 v1(2075,4007) ; D1.2@2074.28,3299 2078.28,3299 2079.28,3300 D1.2 v1(2145,3300) ; v1(2150,3109) U5.1 ; v1(2333,4015) 2389.53,4015 C12.2@2392.53,4018 ; v1(2393,3825) 2459.53,3825 C13.2 ; C7.1 2486.53,3720 v1(2537,3720) ; v1(2536.23,3612.77) 2593.65,3612.77 U3.9@2594.77,3611.65 ; RESET.2 2676.86,3007 v1(2721,3007) ; BOOT.1 2678.01,3180 v1(2722,3180) ; R10.2@2830.5,3171.97 2831,3171.47 2831,3139 v1(2832,3138) ; v1(2990,3133) R11.2 ; R6.1@3183,3437.5 3188.5,3443 v1(3220,3443) ; C6.2@3197.93,3214 3199.53,3212.4 v1(3260.4,3212.4) ; v1(3356,3928) 3386.37,3958.37 R15.2@3431.94,3958.37 ; R16.2 3551,3901.4 v1(3551,3810) ; v1(4655,3895) 4699.53,3895 PWR.2@4700,3894.53
  other v1: 1961,3102
IF: C1.1 IPM-365.2 | length 1672.3
  Top Layer w10: C1.1 2066.37,3652.83 2102.83,3652.83 2125,3675 2295,3675 v1(2320,3650)
  Bottom Layer w10: v1(2320,3650) 2320,3317.59 2327,3310.59 2327,2981.86 2375.86,2933 2958,2933 IPM-365.2
IO1: STAT.1 U3.17 | length 136.5
  Top Layer w10: U3.17 3301.53,4037.76 3321.77,4037.76 3369.02,4085 STAT.1
IO2: ACT.1 U3.16 | length 136.6
  Top Layer w10: U3.16 3340.98,3965.98 3388.33,4013.33 3388.33,4014.97 3398.36,4025 ACT.1@3400,4025
NetACT_2: ACT.2 R15.1 | length 70.2
  Top Layer w10: ACT.2 3467.37,4016.48 R15.1@3467.37,3959.35
NetC1_2: C1.2 R1.1 | length 252.1
  Top Layer w10: C1.2 2066.02,3577.53 2118.48,3630 2234.8,3630 2269.37,3595.43 R1.1
NetC2_1: C2.1 R1.2 R2.1 U1.2 | length 540.3
  Top Layer w10: U1.2 1890,3452 1927.87,3489.87 1949.35,3489.87 C2.1 1961.61,3499.17 1975.32,3485.47 1975.32,3482.52 1985.05,3472.79 1985.29,3472.79 1988.07,3470 2055.93,3470 2164.11,3578.18 R2.1@2174,3578.18 ; R2.1 2184.83,3585.02 2206.4,3563.45 2206.4,3557.97 2239.41,3524.96 R1.2
NetC2_2: C2.2 C3.1 R2.2 U1.1 | length 820.6
  Top Layer w10: U1.1 1927.87,3433.87 1950.44,3433.87 C2.2 ; C2.2@1958.66,3437.09 2095.09,3437.09 2127.82,3469.82 2174,3469.82 2176.18,3472 v1(2240,3472) ; v1(2211,3729) 2251.53,3769.53 C3.1
  Bottom Layer w10: v1(2211,3729) 2240,3700 v1(2240,3472)
NetC3_2: C3.2 R3.1 | length 137.2
  Top Layer w10: R3.1 2202.63,3782.46 2212.59,3792.42 2212.59,3799.75 2255.31,3842.47 C3.2
NetC4_1: C4.1 R3.2 R4.1 U1.6 | length 398.5
  Top Layer w10: U1.6@1862,3840 1921.84,3780.16 1946.3,3780.16 1960,3766.46 1962.7,3763.76 2046,3763.76 2047.35,3765.11 2093.55,3765.11 2181.37,3852.93 R3.2
NetC4_2: C4.2 R4.2 R13.2 U1.7 | length 306.3
  Top Layer w10: U1.7@1862.86,3939.14 R13.2@1960,3939.14 ; R13.2 1960,3933.34 1960,3823.54 2026.7,3823.54 2037.46,3812.78 2037.76,3812.78 2046,3804.54 R4.2@2046,3804.24
NetC6_1: C6.1 R5.1 R6.2 U1.10 | length 2172.8
  Top Layer w10: U1.10 1700,3598 1700,3415.13 1809.18,3305.96 1883.14,3305.96 1889,3311.81 1889,3363 1931.81,3405.81 2530.59,3405.81 2532.54,3403.86 3111.86,3403.86 ; R5.1 3117.5,3398.21 3111.86,3403.86 ; R6.2 3119.5,3411.5 3111.86,3403.86 ; R5.1@3130.22,3346.91 3129.32,3346 3129.32,3219.16 C6.1
NetC10_1: C10.1 FB1.2 U5.3 | length 620.6
  Top Layer w10: C10.1@2026,2973.19 2027.26,2974.45 U5.3 2150.55,2975 v1(2255,2975) ; FB1.2@2277.16,3336.19 2279.84,3336.19 2300,3316.04 v1(2300,3270)
  Bottom Layer w10: v1(2255,2975) 2300,3020 v1(2300,3270)
NetD1_3: D1.3 U3.13 | length 1777.6
  Top Layer w10: D1.3@2074.28,3336.4 2075.28,3335.4 2106,3335.4 2110.6,3340 v1(2145,3340) ; v1(3167,3845) 3223.18,3788.82 U3.13@3283.75,3788.82
  Bottom Layer w10: v1(2145,3340) 2145,3803 2262,3920 3092,3920 v1(3167,3845)
NetD1_6: D1.6 U3.14 | length 1836.7
  Top Layer w10: D1.6 2004.72,3212.13 2010.58,3206.28 2116.28,3206.28 v1(2131,3221) ; v1(3220,3846) 3281.88,3846 U3.14@3283.75,3847.87
  Bottom Layer w10: v1(2131,3221) 2162,3221 2279,3338 2279,3735 2301.72,3757.72 3142.72,3757.72 3217.39,3832.39 3217.39,3843.39 v1(3220,3846)
NetJ1_A5: J1.A5 R11.1 | length 1691.8
  Top Layer w10: J1.A5 1656.06,3173.11 1656.06,3305.33 1691.92,3341.19 1743.81,3341.19 1807,3278 1893,3278 1906,3291 1906,3353 1941.81,3388.81 2357.57,3388.81 2359.52,3386.86 2775.28,3386.86 2783,3379.14 2783,3319.86 2788.86,3314 2902.56,3314 2988.03,3228.53 R11.1
NetJ1_B5: J1.B5 R10.1 | length 1441.6
  Top Layer w10: J1.B5 1774.17,3171.3 1774.17,3094.83 1835,3034 1894,3034 1992,2936 2737,2936 2785,2984 2785,3186.53 2810.84,3212.36 2823.19,3224.72 2823.19,3226.69 2828.03,3231.53 R10.1
NetPWR_1: PWR.1 R12.2 | length 787
  Top Layer w10: PWR.1 4711.37,3834.1 4711.37,3810.59 4721.76,3800.2 R12.2
NetR13_1: R13.1 R14.2 U1.12 | length 918.3
  Top Layer w10: v1(1905,4035) 1939.57,4035 R14.2@1963.66,4059.09 ; R14.2 R14.2@1963.66,4059.09 ; R13.1 2046.34,3981.53 1987.39,4040.47 1982.28,4040.47 R14.2@1963.66,4059.09
  Bottom Layer w10: U1.12 1692.09,3698.09 1692.09,3912.09 1815,4035 v1(1905,4035)
NetR16_1: R16.1 STAT.2 | length 185.5
  Top Layer w10: STAT.2 3495,4085 3550,4030 R16.1@3550,3957.72
NetU1_13: U1.13 U1.14 U3.3 | length 1449
  Top Layer w10: U1.14 U1.13 ; v1(2547,3964) 2597.85,3964 U3.3
  Bottom Layer w10: U1.13 1768,3674 1768,3821.52 1768,3825.66 1814.65,3879.23 cw(c1846,3852) 1822.86,3886.48 ; 1822.9,3886.51 1938.46,3964 v1(2547,3964)
RX: P1.2 U3.12 | length 155.4
  Top Layer w10: U3.12 3405.87,3729.76 3406.35,3730.24 3430.24,3730.24 P1.2
SCL: R8.1 U3.15 U4.3 | length 2260.1
  Top Layer w10: R8.1 2985,3551.3 ; U3.15@3283.75,3906.93 3182.93,3906.93 2985,3709 2985,3551.3 ; U4.3 3665.07,3470 3583.77,3551.3 2985,3551.3
SDA: R9.1 U3.7 U4.4 | length 2236.1
  Top Layer w10: U3.7@2594.77,3729.76 U3.7 2606.58,3729.76 2808.27,3528.08 2808.27,3464.14 2820.16,3452.24 R9.1 2849.84,3452.24 2880.09,3422 3059.14,3422 3065,3427.86 3065,3459 3091,3485 3295,3485 3410,3370 U4.4
TX: P1.3 U3.11 | length 167.5
  Top Layer w10: U3.11 3415.48,3670.71 3440,3646.19 P1.3
Vref: U1.3 U1.5 U1.8 U1.9 | length 692.8
  Top Layer w10: U1.8@1562,3940 1562,3840 1662,3740 1862,3740 1800,3678 1800,3602 U1.3@1862,3540
pads on no net: BOOT.H1 J1.A8 J1.B8 J1.MH RESET.H1 U3.4 U3.5 U3.6 U3.10 U3.18 U4.S1 U4.S2 U4.S3 U4.S4

## Polygon pours and split planes (outlines as drawn)
GND on Bottom Layer "GND_L02_P015" (solid, remove dead copper, pour order 15): 1290,2974.06 1290,4065.94 cw(c1349.06,4065.94) 1349.06,4125 4925.94,4125 cw(c4925.94,4065.94) 4985,4065.94 4985,2974.06 cw(c4925.94,2974.06) 4925.94,2915 1349.06,2915 cw(c1349.06,2974.06)
GND on Top Layer "GND_L01_P014" (solid, remove dead copper, pour order 14): 1290,2974.06 1290,4065.94 cw(c1349.06,4065.94) 1349.06,4125 4925.94,4125 cw(c4925.94,4065.94) 4985,4065.94 4985,2974.06 cw(c4925.94,2974.06) 4925.94,2915 1349.06,2915 cw(c1349.06,2974.06)

## Silkscreen, mask and mechanical layers (free items; w line width, h text height)
Top Overlay:
  text "BR6511 v1.0" at 3777.09,4058.09 h39.37
  text "TORUSEMD LLC" at 4239.09,4056.09 h39.37
  text "RX" at 3507.09,3722.09 h39.37
  text "TX" at 3507.09,3624.09 h39.37
  text "Speed Radar" at 2350,3425 h90.55
  text "5V" at 3284,2944 h25
  text "GND" at 3374,2944 h25
Mechanical 1:
  lines w10: 1295,2974.06 ccw(c1354.06,2974.06) 1354.06,2915 4925.94,2915 ccw(c4925.94,2974.06) 4985,2974.06 4985,4065.94 ccw(c4925.94,4065.94) 4925.94,4125 1354.06,4125 ccw(c1354.06,4065.94) 1295,4065.94 1295,2974.06
  lines w15: 5675.09,3015 6085,3015 7014.74,3015 7874.51,3015 8524.35,3015 9094.21,3015 ; 5675.09,3135 6085,3135 7014.74,3135 7874.51,3135 8524.35,3135 9094.21,3135 ; 5675.09,3255 6085,3255 7014.74,3255 7874.51,3255 8524.35,3255 9094.21,3255 ; 5675.09,3375 6085,3375 7014.74,3375 7874.51,3375 8524.35,3375 9094.21,3375 ; 5675.09,3495 6085,3495 7014.74,3495 7874.51,3495 8524.35,3495 9094.21,3495 ; 5675.09,3615 6085,3615 7014.74,3615 7874.51,3615 8524.35,3615 9094.21,3615 ; 5675.09,3735 9094.21,3735 ; 6085,3855 6085,2895 ; 7014.74,3855 7014.74,2895 ; 7874.51,3855 7874.51,2895 ; 8524.35,3855 8524.35,2895 ; 6085,2895 7014.74,2895 ; 6085,2895 5675.09,2895 5675.09,3855 9094.21,3855 9094.21,2895 8524.35,2895 ; 7014.74,2895 7874.51,2895 ; 7874.51,2895 8524.35,2895
  text "Layer" at 5745.09,3765 h60
  text "Name" at 6155,3765 h60
  text "Material" at 7084.74,3765 h60
  text "Thickness" at 7944.51,3765 h60
  text "Constant" at 8594.35,3765 h60
  text "Top Overlay" at 6155,3645 h60
  text "Top Solder" at 6155,3525 h60
  text "Solder Resist" at 7084.74,3525 h60
  text "0.40mil" at 7944.51,3525 h60
  text "3.5" at 8594.35,3525 h60
  text "1" at 5745.09,3405 h60
  text "Top Layer" at 6155,3405 h60
  text "Copper" at 7084.74,3405 h60
  text "1.40mil" at 7944.51,3405 h60
  text "Dielectric 1" at 6155,3285 h60
  text "FR-4" at 7084.74,3285 h60
  text "12.60mil" at 7944.51,3285 h60
  text "4.8" at 8594.35,3285 h60
  text "2" at 5745.09,3165 h60
  text "Bottom Layer" at 6155,3165 h60
  text "Copper" at 7084.74,3165 h60
  text "1.40mil" at 7944.51,3165 h60
  text "Bottom Solder" at 6155,3045 h60
  text "Solder Resist" at 7084.74,3045 h60
  text "0.40mil" at 7944.51,3045 h60
  text "3.5" at 8594.35,3045 h60
  text "Bottom Overlay" at 6155,2925 h60
Drill Drawing:
  circle w10: c122.62,1434.28 r20
  circle w10: c122.62,1434.28 r33.33
  circle w10: c122.62,1284.28 r33.33
  lines w10: 89.29,800.94 122.62,817.61 155.96,800.94 139.29,834.27 155.96,867.61 122.62,850.94 89.29,867.61 105.96,834.27 89.29,800.94 ; 89.29,950.94 155.96,950.94 155.96,1017.61 89.29,1017.61 89.29,950.94 ; 89.29,1117.61 105.96,1117.61 122.62,1100.94 139.29,1117.61 155.96,1117.61 139.29,1134.28 155.96,1150.94 139.29,1150.94 122.62,1167.61 105.96,1150.94 89.29,1150.94 105.96,1134.28 89.29,1117.61 ; 89.29,1617.61 155.96,1617.61 122.62,1550.94 89.29,1617.61 ; 89.29,1734.28 122.62,1700.94 155.96,1734.28 122.62,1767.61 89.29,1734.28 ; 89.29,1867.61 105.96,1867.61 105.96,1850.94 139.29,1850.94 139.29,1867.61 155.96,1867.61 155.96,1900.94 139.29,1900.94 139.29,1917.61 105.96,1917.61 105.96,1900.94 89.29,1900.94 89.29,1867.61 ; 89.29,2000.94 89.29,2017.61 105.96,2034.28 89.29,2050.94 89.29,2067.61 105.96,2067.61 122.62,2050.94 139.29,2067.61 155.96,2067.61 155.96,2050.94 139.29,2034.28 155.96,2017.61 155.96,2000.94 139.29,2000.94 122.62,2017.61 105.96,2000.94 89.29,2000.94 ; 89.29,2150.94 155.96,2150.94 155.96,2217.61 89.29,2217.61 89.29,2150.94 ; 102.62,2164.28 142.62,2164.28 142.62,2204.28 102.62,2204.28 102.62,2164.28
  lines w15: 29.5,755.94 13967.55,755.94 ; 29.5,2255.94 13967.55,2255.94 ; 580.38,605.94 580.38,2405.94 ; 1120.24,605.94 1120.24,2405.94 ; 2269.9,605.94 2269.9,2405.94 ; 2775.78,605.94 2775.78,2405.94 ; 3509.58,605.94 3509.58,2405.94 ; 5009.13,605.94 5009.13,2405.94 ; 5598.98,605.94 5598.98,2405.94 ; 6344.78,605.94 6344.78,2405.94 ; 7954.29,605.94 7954.29,2405.94 ; 8808.05,605.94 8808.05,2405.94 ; 10141.66,605.94 10141.66,2405.94 ; 11475.27,605.94 11475.27,2405.94 ; 12564.95,605.94 12564.95,2405.94 ; 29.5,605.94 13967.55,605.94 13967.55,2405.94 29.5,2405.94 29.5,605.94
  text "Symbol" at 119.5,2300.94 h72
  text "Count" at 625.38,2300.94 h72
  text "Hole Size" at 1165.24,2300.94 h72
  text "Plated" at 2314.9,2300.94 h72
  text "Hole Type" at 2820.78,2300.94 h72
  text "Drill Layer Pair" at 3554.58,2300.94 h72
  text "Via/Pad" at 5054.13,2300.94 h72
  text "Pad Shape" at 5643.98,2300.94 h72
  text "Template" at 6389.78,2300.94 h72
  text "Description" at 7999.29,2300.94 h72
  text "Hole Tolerance (+)" at 8853.05,2300.94 h72
  text "Hole Tolerance (-)" at 10186.66,2300.94 h72
  text "Hole Length" at 11520.27,2300.94 h72
  text "Routed Path Length" at 12609.95,2300.94 h72
  text "1" at 625.38,2150.94 h60
  text "39.37mil (1.000mm)" at 1165.24,2150.94 h60
  text "PTH" at 2314.9,2150.94 h60
  text "Square" at 2820.78,2150.94 h60
  text "Top Layer - Bottom Layer" at 3554.58,2150.94 h60
  text "Pad" at 5054.13,2150.94 h60
  text "Rounded" at 5643.98,2150.94 h60
  text "c180h100" at 6389.78,2150.94 h60
  text "-" at 11520.27,2150.94 h60
  text "-" at 12609.95,2150.94 h60
  text "2" at 625.38,2000.94 h60
  text "21.65mil (0.550mm)" at 1165.24,2000.94 h60
  text "PTH" at 2314.9,2000.94 h60
  text "Slot" at 2820.78,2000.94 h60
  text "Top Layer - Bottom Layer" at 3554.58,2000.94 h60
  text "Pad" at 5054.13,2000.94 h60
  text "Rounded" at 5643.98,2000.94 h60
  text "r190_100h55_145r50m200_110" at 6389.78,2000.94 h60
  text "57.09mil (1.450mm)" at 11520.27,2000.94 h60
  text "35.43mil (0.900mm)" at 12609.95,2000.94 h60
  text "2" at 625.38,1850.94 h60
  text "21.65mil (0.550mm)" at 1165.24,1850.94 h60
  text "PTH" at 2314.9,1850.94 h60
  text "Slot" at 2820.78,1850.94 h60
  text "Top Layer - Bottom Layer" at 3554.58,1850.94 h60
  text "Pad" at 5054.13,1850.94 h60
  text "Rounded" at 5643.98,1850.94 h60
  text "r220_100h55_175r50m230_110" at 6389.78,1850.94 h60
  text "68.90mil (1.750mm)" at 11520.27,1850.94 h60
  text "47.24mil (1.200mm)" at 12609.95,1850.94 h60
  text "2" at 625.38,1700.94 h60
  text "23.62mil (0.600mm)" at 1165.24,1700.94 h60
  text "NPTH" at 2314.9,1700.94 h60
  text "Round" at 2820.78,1700.94 h60
  text "Top Layer - Bottom Layer" at 3554.58,1700.94 h60
  text "Pad" at 5054.13,1700.94 h60
  text "Rounded" at 5643.98,1700.94 h60
  text "c60hn60m120" at 6389.78,1700.94 h60
  text "-" at 11520.27,1700.94 h60
  text "-" at 12609.95,1700.94 h60
  text "4" at 625.38,1550.94 h60
  text "78.74mil (2.000mm)" at 1165.24,1550.94 h60
  text "PTH" at 2314.9,1550.94 h60
  text "Round" at 2820.78,1550.94 h60
  text "Top Layer - Bottom Layer" at 3554.58,1550.94 h60
  text "Pad" at 5054.13,1550.94 h60
  text "Rounded" at 5643.98,1550.94 h60
  text "c300h200" at 6389.78,1550.94 h60
  text "-" at 11520.27,1550.94 h60
  text "-" at 12609.95,1550.94 h60
  text "4" at 625.38,1400.94 h60
  text "100.00mil (2.540mm)" at 1165.24,1400.94 h60
  text "PTH" at 2314.9,1400.94 h60
  text "Round" at 2820.78,1400.94 h60
  text "Top Layer - Bottom Layer" at 3554.58,1400.94 h60
  text "Pad" at 5054.13,1400.94 h60
  text "Rounded" at 5643.98,1400.94 h60
  text "c381h254" at 6389.78,1400.94 h60
  text "-" at 11520.27,1400.94 h60
  text "-" at 12609.95,1400.94 h60
  text "5" at 625.38,1250.94 h60
  text "40.16mil (1.020mm)" at 1165.24,1250.94 h60
  text "PTH" at 2314.9,1250.94 h60
  text "Round" at 2820.78,1250.94 h60
  text "Top Layer - Bottom Layer" at 3554.58,1250.94 h60
  text "Pad" at 5054.13,1250.94 h60
  text "(Mixed)" at 5643.98,1250.94 h60
  text "(Mixed)" at 6389.78,1250.94 h60
  text "-" at 11520.27,1250.94 h60
  text "-" at 12609.95,1250.94 h60
  text "6" at 625.38,1100.94 h60
  text "39.37mil (1.000mm)" at 1165.24,1100.94 h60
  text "PTH" at 2314.9,1100.94 h60
  text "Round" at 2820.78,1100.94 h60
  text "Top Layer - Bottom Layer" at 3554.58,1100.94 h60
  text "Pad" at 5054.13,1100.94 h60
  text "Rounded" at 5643.98,1100.94 h60
  text "(Mixed)" at 6389.78,1100.94 h60
  text "-" at 11520.27,1100.94 h60
  text "-" at 12609.95,1100.94 h60
  text "14" at 625.38,950.94 h60
  text "35.43mil (0.900mm)" at 1165.24,950.94 h60
  text "PTH" at 2314.9,950.94 h60
  text "Round" at 2820.78,950.94 h60
  text "Top Layer - Bottom Layer" at 3554.58,950.94 h60
  text "Pad" at 5054.13,950.94 h60
  text "(Mixed)" at 5643.98,950.94 h60
  text "(Mixed)" at 6389.78,950.94 h60
  text "-" at 11520.27,950.94 h60
  text "-" at 12609.95,950.94 h60
  text "58" at 625.38,800.94 h60
  text "11.81mil (0.300mm)" at 1165.24,800.94 h60
  text "PTH" at 2314.9,800.94 h60
  text "Round" at 2820.78,800.94 h60
  text "Top Layer - Bottom Layer" at 3554.58,800.94 h60
  text "(Mixed)" at 5054.13,800.94 h60
  text "Rounded" at 5643.98,800.94 h60
  text "(Mixed)" at 6389.78,800.94 h60
  text "-" at 11520.27,800.94 h60
  text "-" at 12609.95,800.94 h60
  text "98 Total" at 625.38,650.94 h60
  text "Slot definitions :" at 119.5,505.97 h60
  text "Routed Path Length" at 1152.19,505.97 h60
  text "= Calculated from tool start centre position to tool end centre position." at 2254.86,505.97 h60
  text "Hole Length" at 1152.19,405.99 h60
  text "= Routed Path Length + Tool Size = Slot length as defined in the PCB layout" at 1844.99,405.99 h60

## Dimensions
1295,2974.06 to 4985,2974.06 on Mechanical 1
4925.94,2915 to 4925.94,4125 on Mechanical 1